# Altium PCB 枪盒触摸板-20201219.PcbDoc
Units mm, origin at the board's own origin, x right, y up, seen from the top; angles counter-clockwise.
Board outline 54 x 20.75 mm, 2 copper layers (Top Layer, Bottom Layer); 44 components, 42 nets, 124 pads, 67 vias.
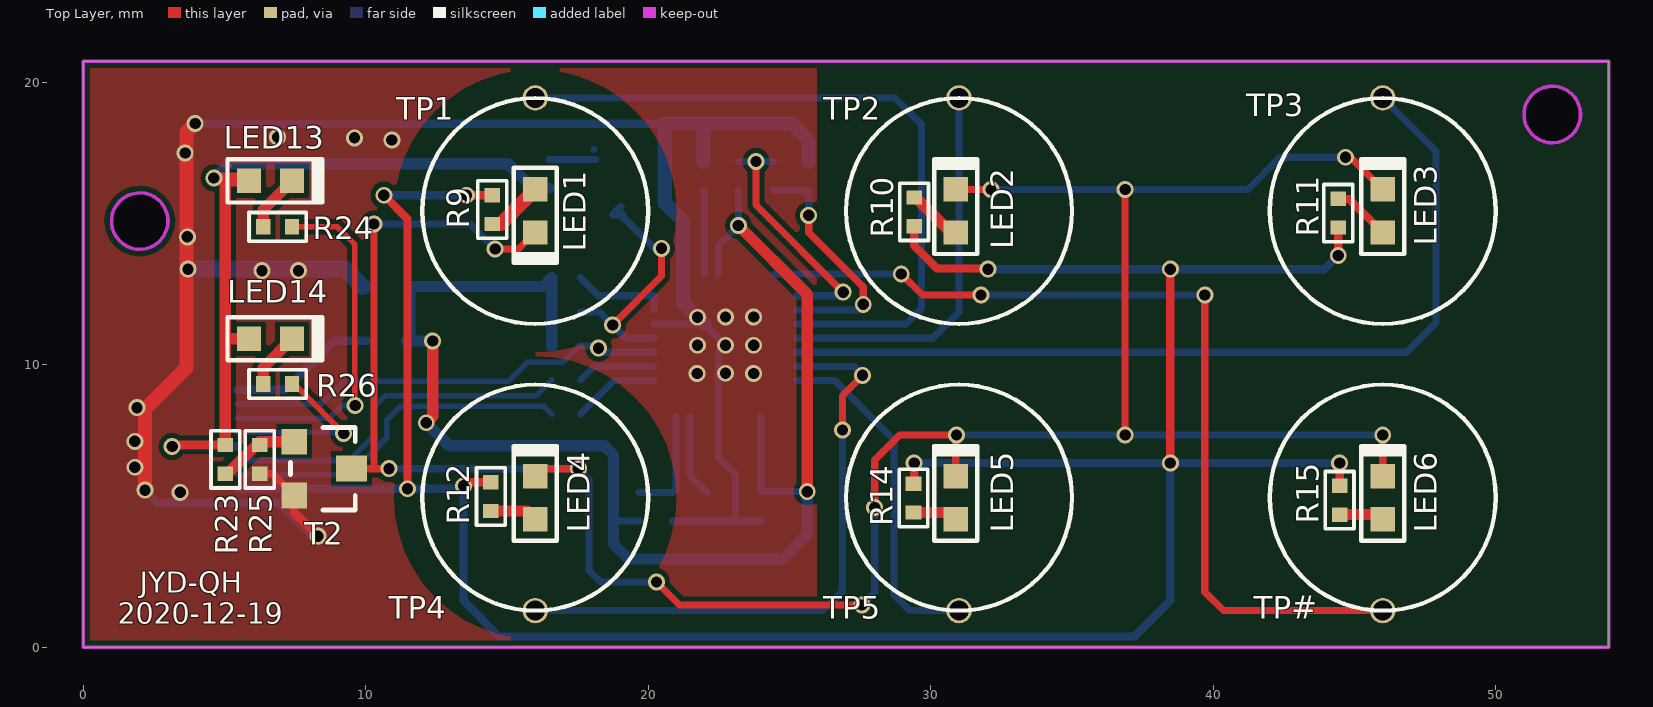
[diagram p0: Top Layer view]
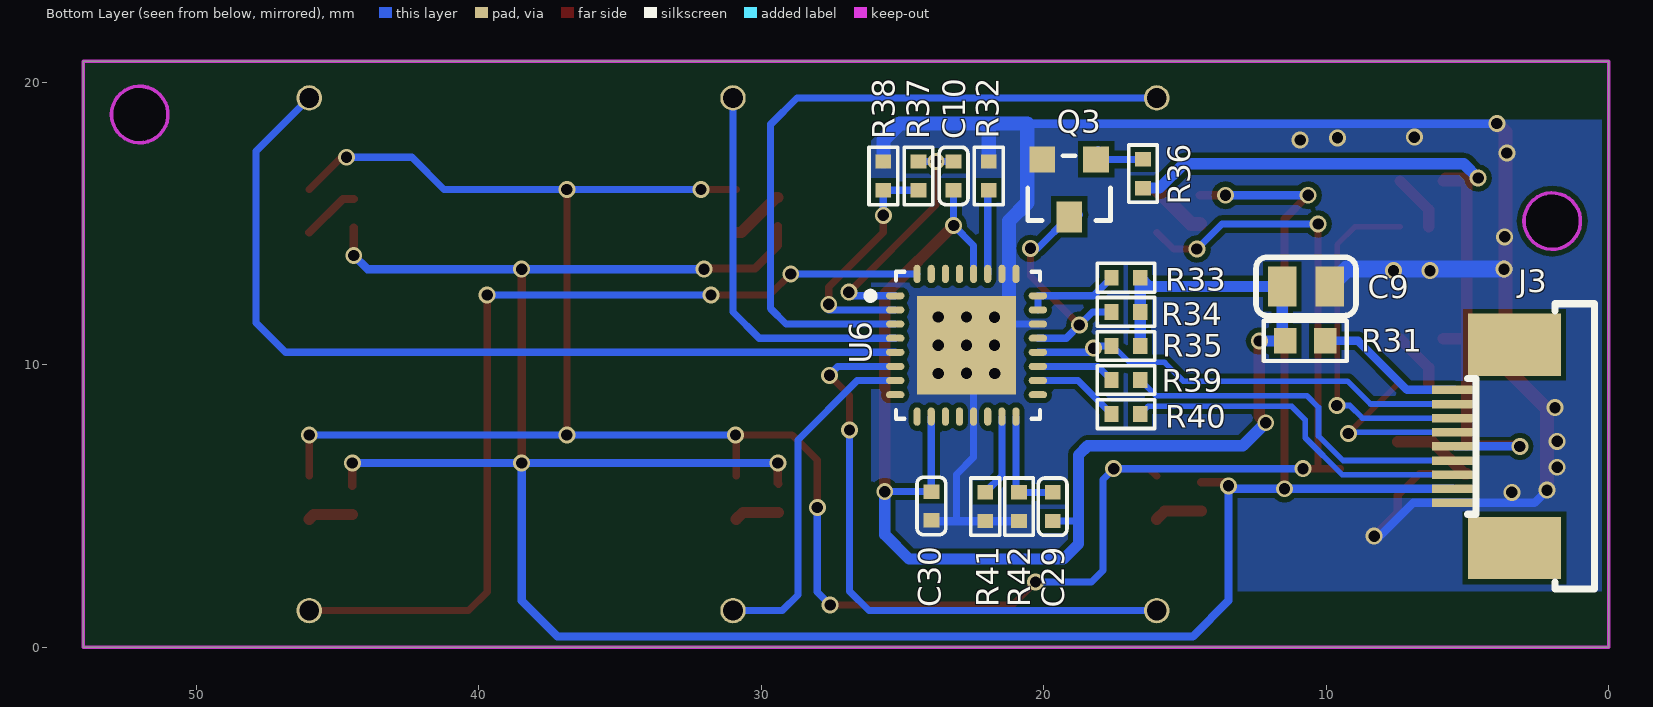
[diagram p1: Bottom Layer view, seen from below]
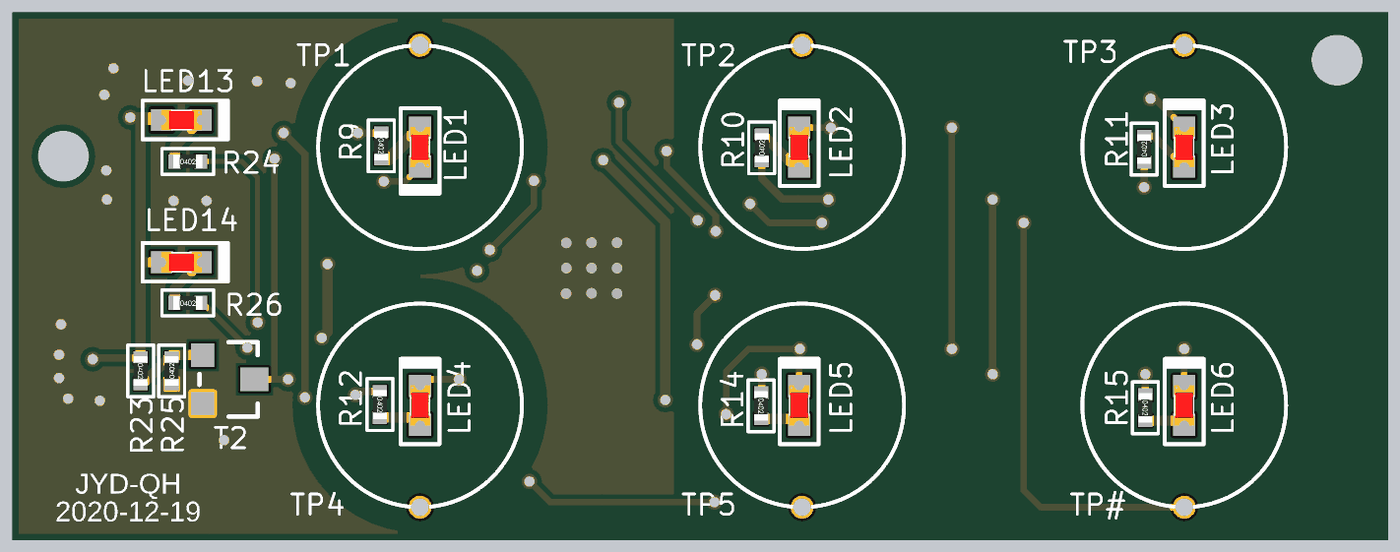
[diagram p2: 3D render of the assembled board from above, using the file's embedded part models]
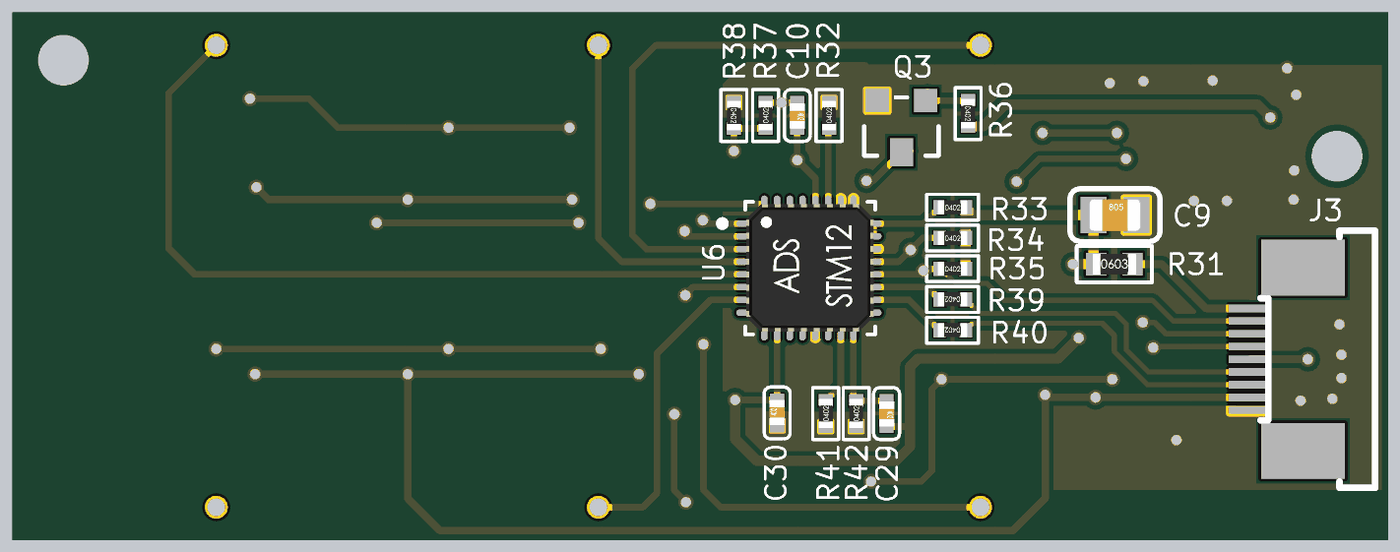
[diagram p3: 3D render of the assembled board from below, using the file's embedded part models]

## Layer stack, top to bottom
Top Layer: signal copper 0.0356
Dielectric: dielectric 0.32, FR-4, Dk 4.8
Bottom Layer: signal copper 0.0356

## Board outline
0,0 0,20.747 54,20.747 54,0
cut-out: 2,14.088 cw(c2,15.088) 1,15.088 cw(c2,15.088) 2,16.088 cw(c2,15.088) 3,15.088 cw(c2,15.088)
cut-out: 51,18.861 ccw(c52,18.861) 52,17.861 ccw(c52,18.861) 53,18.861 ccw(c52,18.861) 52,19.861 ccw(c52,18.861)

## Design rules (kind name [scope] priority, off if disabled: settings)
Clearance Clearance_1 [All] p1 off: gap=0.2
Clearance [All] p2: gap=0.18
ComponentClearance [All] p1: gap=0 collisioncheckmode=3 verticalgap=0 showdistances=FALSE
HoleToHoleClearance [All] p1: gap=0 allowstackedmicrovias=TRUE
MinimumSolderMaskSliver [All] p1: minsoldermaskwidth=0
PolygonConnect [All] p1: connectstyle=Direct reliefconductorwidth=0.254 reliefentries=4 polygonreliefangle="90 Angle" airgapwidth=0.254
RoutingVias [All] p1: holewidth=0.3 width=0.6 viastyle="Through Hole" minholewidth=0.3 minwidth=0.5 maxholewidth=0.4 maxwidth=0.6
SilkToSilkClearance [All] p1: silktosilkclearance=0
SilkToSolderMaskClearance [IsPad] p1: minsilkscreentomaskgap=0 clearancetoexposedcopper=TRUE
SolderMaskExpansion [All] p1: expansion=0.102
Width [All] p1: maxlimit=2 minlimit=0.15 preferedwidth=0.2
23 further rules are at their usual default settings.

## Components (designator, comment, footprint, x,y, rotation, side; value= is the part's Value field where it differs from the comment)
C9 "1uF_16V" 0805C 10.719,12.776 r180 bottom
C10 "820P 1%" 0402C 23.19,16.688 r270 bottom
C29 "0.1uF" 0402C 19.685,4.978 r270 bottom
C30 "0.1uF" 0402C 23.978,5.004 r90 bottom
J3 "触摸板接口" FPC-0.5-9P 4.42,7.112 r90 bottom
LED1 "BLUE" 0603LED 16,15.447 r270 top
LED2 "BLUE" 0603LED 30.886,15.447 r90 top
LED3 "BLUE" 0603LED 46,15.447 r90 top
LED4 "BLUE" 0603LED 16,5.3 r90 top
LED5 "BLUE" 0603LED 30.886,5.3 r90 top
LED6 "BLUE" 0603LED 46,5.3 r90 top
LED13 "red" 0603LED 6.629,16.51 r0 top
LED14 "green" 0603LED 6.629,10.922 r0 top
Q3 "PMBT3904" SOT-23-3L 19.1,16.256 r0 bottom
R9 "1K" 0402R 14.478,15.494 r270 top
R10 "1K" 0402R 29.413,15.418 r90 top
R11 "1K" 0402R 44.425,15.367 r90 top
R12 "1K" 0402R 14.427,5.334 r270 top
R14 "1K" 0402R 29.388,5.283 r270 top
R15 "1K" 0402R 44.475,5.207 r270 top
R23 "1K" 0402R 5.029,6.655 r270 top
R24 "200R" 0402R 6.883,14.884 r0 top
R25 "10K" 0402R 6.248,6.655 r90 top
R26 "200R" 0402R 6.883,9.322 r0 top
R31 "0R" 0603R 10.744,10.846 r180 bottom
R32 "2M" 0402R 21.945,16.688 r90 bottom
R33 "10K" 0402R 17.094,13.081 r180 bottom
R34 "10K" 0402R 17.094,11.874 r180 bottom
R35 "10K" 0402R 17.094,10.668 r180 bottom
R36 "10K" 0402R 16.484,16.764 r270 bottom
R37 "510K 1%" 0402R 24.434,16.688 r90 bottom
R38 "2M 1%" 0402R 25.679,16.688 r270 bottom
R39 "22R" 0402R 17.094,9.461 r0 bottom
R40 "22R" 0402R 17.094,8.255 r0 bottom
R41 "36K 1%" 0402R 22.072,4.978 r90 bottom
R42 "330K" 0402R 20.878,4.978 r90 bottom
T2 "SS8050" SOT-23-3L 8.484,6.325 r270 top
TP1 "PAD" TH 16,15.447 r0 top
TP2 "PAD" TH 31,15.447 r0 top
TP3 "PAD" TH 46,15.447 r0 top
TP4 "PAD" TH 16,5.3 r180 top
TP5 "PAD" TH 31,5.3 r180 top
TP# "PAD" TH 46,5.3 r180 top
U6 "TSM12M" ADS_TMS12 22.733,10.693 r180 bottom

## Footprints (in the part's own frame and the unit in brackets; to place one, negate y for a bottom-side part, rotate by r counter-clockwise, add the part's x,y. Pads: shape width x height; smd on the part's side, far side on the other; paste and mask are expansions set on the pad)
0402C [mil]
  rect 20x22 smd mask+2: 1(-20,0) 2(20,0)
  silkscreen extent -40,-20 40,20, body extent -19,-12 20,12, height 8
0402R [mil]
  rect 20x22 smd mask+2: 1(-20,0) 2(20,0)
  silkscreen extent -40,-20 40,20, body extent -23,-11 23,11, height 16
0603LED [mil]
  rect 34x34 smd: 1(-30,0) 2(30,0)
  silkscreen extent -60,-30 72,30, body extent -32,-16 31,16, height 24
0603R [mm]
  rect 0.8x0.9 smd: 1(-0.711,0) 2(0.711,0)
  silkscreen extent -1.47,-0.71 1.47,0.71, body extent -0.85,-0.4 0.85,0.4, height 0.56
0805C [mil]
  rect 40x56 smd: 1(-33,0) 2(33,0)
  silkscreen extent -70,-41 70,41, body extent -39,-25 39,25, height 30
ADS_TMS12 [mm]
  oval 0.65x0.25 smd: 1(-2.525,1.75) 2(-2.525,1.25) 3(-2.525,0.75) 4(-2.525,0.25) 5(-2.525,-0.25) 6(-2.525,-0.75) 7(-2.525,-1.25) 8(-2.525,-1.75) 17(2.525,-1.75) 18(2.525,-1.25) 19(2.525,-0.75) 20(2.525,-0.25) 21(2.525,0.25) 22(2.525,0.75) 23(2.525,1.25) 24(2.525,1.75)
  oval 0.25x0.65 smd: 9(-1.75,-2.525) 10(-1.25,-2.525) 11(-0.75,-2.525) 12(-0.25,-2.525) 13(0.25,-2.525) 14(0.75,-2.525) 15(1.25,-2.525) 16(1.75,-2.525) 25(1.75,2.525) 26(1.25,2.525) 27(0.75,2.525) 28(0.25,2.525) 29(-0.25,2.525) 30(-0.75,2.525) 31(-1.25,2.525) 32(-1.75,2.525)
  rect 3.5x3.5 smd paste+0: 33(0,0)
  silkscreen extent -3.53,-2.6 2.6,2.6, body extent -2.46,-2.49 2.54,2.51, height 0.9
FPC-0.5-9P [mil]
  rect 11.8x59 smd: 1(-78.72,42.72) 2(-59.02,42.72) 3(-39.32,42.72) 5(-0.02,42.72) 6(19.67,42.72) 7(39.35,42.72) 8(59.03,42.72) 9(78.72,42.72)
  rect 11.9x59 smd: 4(-19.67,42.72)
  rect 86.6x129.9 smd: 10(-141.72,-42.72) 11(141.72,-42.72)
  silkscreen extent -199,-154 199,23
SOT-23-3L [mil]
  rect 36x36 smd: 1(-37.4,-40) 2(37.4,-40)
  rect 36x43.31 smd: 3(0,40)
  silkscreen extent -57,-45 58,45
TH [mm]
  round 0.9 hole 0.7: 1(0,4)
  silkscreen extent -4,-4 4,4

## Part data
C9: library part C-C?, "Electrolytic Capacitor"
C10 C29 C30: library part CAP, "Capacitor"
J3: library part "Header 9", "Header,9-Pin"
LED1 LED2 LED3 LED4 LED5 LED6 LED13 LED14: library part LED
Q3 T2: library part NPN_BJT, "Bipolar Junction Transistor"
R9 R10 R11 R12 R14 R15 R23 R24 R25 R26: library part R
R31: library part POWER-R
R32 R33 R34 R35 R36 R37 R38 R39 R40 R41 R42: library part RES2
TP1 TP2 TP3 TP4 TP5 TP#: library part TestPoint, "Test Point"

## Via types
v1: diameter 0.6, hole 0.4, Top Layer to Bottom Layer, tented both sides, 67 vias

## Nets (pads, with @x,y where several pads share a name; then routed paths per layer and width w, separated by ;. In a path a pad name is that pad's centre, name@x,y a point inside that pad or via, vN(x,y) a via of type N, cw(c..) or ccw(c..) an arc to the next point about the centre after c; other vN are vias at no path point)
GND: C9.2 C30.1 J3.1 Q3.2 R25.1 R32.2 R38.1 R41.1 R42.1 T2.2 U6.13 U6.22 U6.25 U6.26 U6.33 | length 74.5
  Top Layer w0.254: R25.1 6.695,6.147 T2.2
  Top Layer w0.3: T2.2 7.468,4.775 v1(8.306,3.937)
  Top Layer w0.5: v1(2.184,5.563) 2.184,8.433 3.658,9.906 3.658,18.237 v1(3.962,18.542)
  Bottom Layer w0.254: U6.22 21.983,11.443 v1(22.733,10.693) 22.483,10.443 U6.13 22.483,6.727 23.089,6.121 23.089,4.47
  Bottom Layer w0.3: v1(2.184,5.563) 2.634,5.113 6.927,5.113 8.103,3.937 v1(8.306,3.937) ; v1(3.962,18.542) 20.584,18.542 ; R42.1 23.089,4.47 23.952,4.47 C30.1
  Bottom Layer w0.5: R32.2 21.945,18.517 ; U6.33@21.983,11.443 21.234,12.192 21.234,15.088 20.584,15.738 20.584,18.542 25.095,18.542 25.679,17.958 R38.1
  Bottom Layer w0.6: v1(3.708,13.386) 9.271,13.386 C9.2
  other v1: 3.429,5.486 1.829,6.375 1.829,7.29 1.905,8.484 21.733,9.693 23.733,9.693 22.733,9.703 21.742,10.693 23.733,10.693 21.742,11.684 22.733,11.693 23.733,11.693 6.325,13.335 7.62,13.335 3.683,14.529 3.607,17.501 10.922,17.958 9.601,18.034 6.883,18.059
IRQ_TSM12: J3.8 R35.1 U6.20 | length 15.7
  Bottom Layer w0.2: J3.8@5.454,8.613 8.435,8.613 9.246,9.423 15.062,9.423 15.727,10.089 16.964,10.089 17.543,10.668 R35.1
  Bottom Layer w0.254: R35.1 18.136,10.668 18.36,10.443 U6.20
  other v1: 18.237,10.592
KEY0: U6.30
KEY1: TP1.1 U6.3 | length 25.2
  Bottom Layer w0.254: TP1.1 28.737,19.447 29.667,18.517 29.667,11.989 29.122,11.443 U6.3
KEY2: TP2.1 U6.4 | length 13.7
  Bottom Layer w0.254: U6.4 30.07,10.943 31,11.874 TP2.1
KEY3: TP3.1 U6.5 | length 31.8
  Bottom Layer w0.254: U6.5 46.842,10.443 47.879,11.481 47.879,17.568 TP3.1
KEY4: TP4.1 U6.6 | length 21.6
  Top Layer w0.254: v1(26.873,7.696) 26.873,8.915 v1(27.584,9.627)
  Bottom Layer w0.254: TP4.1 26.187,1.3 26.873,1.986 v1(26.873,7.696) ; U6.6 27.293,9.943 27.584,9.652 v1(27.584,9.627)
KEY5: TP5.1 U6.7 | length 12.3
  Bottom Layer w0.254: U6.7 26.599,9.443 28.702,7.341 28.702,1.854 29.256,1.3 TP5.1
KEY6: U6.9
KEY7: U6.11
KEY8: U6.12
KEY9: U6.29
KEY#: TP#.1 U6.32 | length 32.6
  Top Layer w0.254: v1(28.956,13.218) 29.703,12.471 v1(31.775,12.471) ; v1(39.7,12.471) 39.7,1.96 40.361,1.3 TP#.1
  Bottom Layer w0.254: U6.32 v1(28.956,13.218) ; v1(31.775,12.471) v1(39.7,12.471)
KEY*: U6.31
LED_GREEN: J3.6 R26.2 | length 6.3
  Top Layer w0.2: R26.2 7.468,9.322 v1(9.22,7.569)
  Bottom Layer w0.2: J3.6@5.454,7.613 9.177,7.613 v1(9.22,7.569)
LED_RED: J3.7 R24.2 | length 12.5
  Top Layer w0.2: R24.2 8.992,14.884 9.617,14.259 v1@9.617,8.56
  Bottom Layer w0.2: J3.7@5.454,8.113 8.722,8.113 9.169,8.56 v1(9.627,8.56)
M3V3: J3.9 R31.2 | length 5.3
  Bottom Layer w0.3: J3.9@5.454,9.113 7.137,9.113 8.871,10.846 R31.2
NetC10_1: C10.1 R37.2 U6.1 | length 8.7
  Top Layer w0.254: v1(23.812,17.196) 23.812,15.659 v1(26.899,12.573)
  Bottom Layer w0.254: C10.1 v1(23.812,17.196) R37.2 ; U6.1 v1@26.769,12.443
NetC29_1: C29.1 R42.2 U6.16 | length 3.9
  Bottom Layer w0.254: C29.1 R42.2 20.983,5.591 U6.16
NetLED1_1: LED1.1 R9.2 | length 2
  Top Layer w0.5: R9.2 14.777,14.986 LED1.1
NetLED1_2: LED1.2 LED2.2 LED3.2 LED4.2 LED5.2 LED6.2 T2.3 | length 89.9
  Top Layer w0.254: T2.3 10.287,6.325 ; v1(10.287,14.986) 10.287,6.325 ; v1(10.82,6.325) 10.287,6.325 ; v1(14.58,14.097) 15.412,14.097 LED1.2 ; LED4.2 16.263,6.325 v1(17.526,6.325) ; v1(20.295,2.311) 21.107,1.499 v1(27.559,1.499) ; v1(28.016,4.953) 28.016,6.629 28.906,7.519 v1(30.911,7.519) 30.886,7.494 LED5.2 ; LED2.2 v1(32.131,16.209) ; v1(36.881,7.518) v1(36.881,16.209) ; v1(44.679,17.348) 44.861,17.348 LED3.2 ; LED6.2 v1(46,7.519)
  Bottom Layer w0.254: v1(10.287,14.986) 13.691,14.986 v1(14.58,14.097) ; v1(10.82,6.325) v1(17.526,6.325) 17.907,5.944 17.907,2.718 18.313,2.311 v1(20.295,2.311) ; v1(27.559,1.499) 28.016,1.956 v1(28.016,4.953) ; v1(30.911,7.519) v1(36.881,7.518) v1(46,7.519) ; v1(32.131,16.209) v1(36.881,16.209) 41.228,16.209 42.367,17.348 v1(44.679,17.348)
NetLED2_1: LED2.1 R10.2 | length 2
  Top Layer w0.4: R10.2 29.468,15.926 30.709,14.685 LED2.1
NetLED3_1: LED3.1 R11.2 | length 2.1
  Top Layer w0.29: R11.2 44.81,15.875 LED3.1
NetLED4_1: LED4.1 R12.2 | length 1.7
  Top Layer w0.4: R12.2 15.712,4.826 LED4.1
NetLED5_1: LED5.1 R14.2 | length 1.6
  Top Layer w0.4: R14.2 30.649,4.775 LED5.1
NetLED6_1: LED6.1 R15.2 | length 1.6
  Top Layer w0.4: R15.2 45.839,4.699 LED6.1
NetLED13_2: LED13.2 R24.1 | length 2
  Top Layer w0.4: R24.1 6.375,15.494 LED13.2
NetLED14_2: LED14.2 R26.1 | length 2
  Top Layer w0.4: R26.1 6.375,9.906 LED14.2
NetQ3_1: Q3.1 R36.1 | length 1.7
  Bottom Layer w0.254: R36.1 Q3.1
NetQ3_3: Q3.3 R34.1 U6.21 | length 9
  Top Layer w0.254: v1(18.741,11.409) 20.472,13.141 v1(20.472,14.122)
  Bottom Layer w0.254: R34.1 18.275,11.874 v1(18.741,11.409) 19.206,10.943 U6.21 ; Q3.3@19.024,15.596 18.741,15.312 Q3.3@19.1,15.312 ; Q3.3 20.218,14.122 v1(20.472,14.122)
NetR23_2: R23.2 R25.2 T2.1 | length 2.9
  Top Layer w0.4: R23.2 5.112,6.147 6.24,7.275 T2.1
NetR32_1: R32.1 U6.27 | length 3
  Bottom Layer w0.254: R32.1 21.983,16.142 U6.27
NetR33_1: R33.1 U6.23 U6.24 | length 3.4
  Bottom Layer w0.254: R33.1 18.239,12.443 U6.24 U6.23
NetR37_1: R37.1 R38.2 U6.2 | length 8.5
  Top Layer w0.254: v1(25.679,15.291) 25.679,14.682 27.61,12.751 v1(27.61,12.141)
  Bottom Layer w0.254: R37.1 R38.2@25.502,16.18 ; U6.2 v1@27.61,11.943 ; v1(25.679,15.291) 25.679,16.002 R38.2@25.502,16.18 ; R38.2 R38.2@25.502,16.18
NetR39_2: R39.2 U6.19 | length 2.8
  Bottom Layer w0.254: R39.2 18.084,9.943 U6.19
NetR40_2: R40.2 U6.18 | length 3.1
  Bottom Layer w0.254: R40.2 18.79,9.443 U6.18
NetR41_2: R41.2 U6.15 | length 2.9
  Bottom Layer w0.254: U6.15 21.483,6.076 R41.2
SCL: J3.3 R40.1 | length 12.6
  Bottom Layer w0.2: J3.3@5.454,6.113 9.44,6.113 10.744,7.417 10.744,8.052 11.223,8.53 16.311,8.53 R40.1
SDA: J3.4 R39.1 | length 12.9
  Bottom Layer w0.2: J3.4@5.454,6.612 9.402,6.612 10.272,7.482 10.272,8.494 10.688,8.91 16.035,8.91 R39.1
TSM3V3: C9.1 C10.2 C29.2 C30.2 R31.1 R33.2 R34.2 R35.2 U6.10 U6.28 | length 51.5
  Top Layer w0.4: v1(12.141,7.95) 12.37,8.179 v1(12.37,10.846) ; v1(23.19,14.935) 25.629,12.496 v1(25.629,5.512)
  Bottom Layer w0.254: 18.771,4.445 18.796,4.47 C29.2 ; U6.28 22.483,14.228 v1(23.19,14.935) C10.2 ; C30.2 v1(25.629,5.512) ; C30.2@23.983,5.543 U6.10
  Bottom Layer w0.4: v1(12.141,7.95) 12.954,7.137 18.44,7.137 18.771,6.807 18.771,4.445 18.771,3.658 19.304,3.124 24.765,3.124 25.629,3.988 v1(25.629,5.512) ; v1(12.37,10.846) R31.1 11.557,10.947 C9.1 16.281,12.776 R33.2 R34.2 R35.2
V6V: J3.2 R9.1 R10.1 R11.1 R12.1 R14.1 R15.1 | length 99.3
  Top Layer w0.29: v1(10.643,16.002) 11.481,15.164 v1(11.481,5.613) ; v1(13.462,5.715) 13.589,5.842 R12.1 ; v1(13.564,16.002) R9.1 ; R14.1 29.413,5.817 v1(29.413,6.528) ; R10.1 29.413,14.224 30.226,13.411 32.004,13.411 v1(32.029,13.386) ; v1(38.481,6.528) v1(38.481,13.386) ; v1(44.425,13.868) R11.1 ; R15.1 v1(44.475,6.528)
  Bottom Layer w0.29: J3.2 13.36,5.613 v1(13.462,5.715) 13.462,1.651 14.724,0.389 37.219,0.389 38.481,1.651 v1(38.481,6.528) ; v1(10.643,16.002) v1(13.564,16.002) ; v1(29.413,6.528) v1(38.481,6.528) ; v1(32.029,13.386) v1(38.481,13.386) 43.942,13.386 v1(44.425,13.868) ; v1(44.475,6.528) v1(38.481,6.528)
VDD3V3: J3.5 LED13.1 LED14.1 R23.1 R36.2 | length 28.9
  Top Layer w0.3: v1(3.149,7.113) 3.199,7.163 R23.1
  Top Layer w0.4: v1(4.623,16.612) 5.765,16.612 LED13.1 5.029,16.51 5.029,10.922 ; R23.1 5.029,10.922 ; LED14.1 5.029,10.922
  Bottom Layer w0.3: v1(3.149,7.113) J3.5@5.454,7.113
  Bottom Layer w0.4: v1(4.623,16.612) 5.131,17.12 15.037,17.12 15.9,16.256 R36.2
pads on no net: J3.10 J3.11 U6.8 U6.14 U6.17

## Polygon pours and split planes (outlines as drawn)
GND on Top Layer "Top Layer-No Net" (solid, remove dead copper, pour order 11): 0,0 0,20.747 26.01,20.747 25.967,20.696 25.967,0
GND on Bottom Layer "Top Layer-No Net" (solid, remove dead copper, pour order 13): 0,1.981 0,18.669 25.375,18.669 26.111,17.932 26.111,2.921 25.756,2.565 25.171,1.981 0,1.981

## Keep-outs
Keep-Out Layer:
  circle w0.127: c2,15.088 r1
  circle w0.127: c52,18.861 r1
  lines w0.127: 0,0 54,0 54,20.747 0,20.747 0,0

## Other copper
Top Layer:
  pour cut-out: 16,10.447 cw(c16,15.447) 11,15.447 cw(c16,15.447) 16,20.447 cw(c16,15.447) 21,15.447 cw(c16,15.447)
  pour cut-out: 11,5.3 ccw(c16,5.3) 16,0.3 ccw(c16,5.3) 21,5.3 ccw(c16,5.3) 16,10.3 ccw(c16,5.3)
  pour cut-out: 26,15.447 ccw(c31,15.447) 31,10.447 ccw(c31,15.447) 36,15.447 ccw(c31,15.447) 31,20.447 ccw(c31,15.447)
  pour cut-out: 26,5.3 ccw(c31,5.3) 31,0.3 ccw(c31,5.3) 36,5.3 ccw(c31,5.3) 31,10.3 ccw(c31,5.3)
  pour cut-out: 41,5.3 ccw(c46,5.3) 46,0.3 ccw(c46,5.3) 51,5.3 ccw(c46,5.3) 46,10.3 ccw(c46,5.3)
  pour cut-out: 41,15.447 ccw(c46,15.447) 46,10.447 ccw(c46,15.447) 51,15.447 ccw(c46,15.447) 46,20.447 ccw(c46,15.447)

## Silkscreen, mask and mechanical layers (free items; w line width, h text height)
Top Overlay:
  text "JYD-QH" at 2.007,1.676 h1.27
  text "2020-12-19" at 1.219,0.584 h1.27